# Altium PCB CH32V305G-R0-1v0.PcbDoc
Units mil, origin at the board's own origin, x right, y up, seen from the top; angles counter-clockwise.
Board outline 1456.69 x 2047.24 mil, 2 copper layers (Top Layer, Bottom Layer); 27 components, 38 nets, 145 pads, 213 vias.
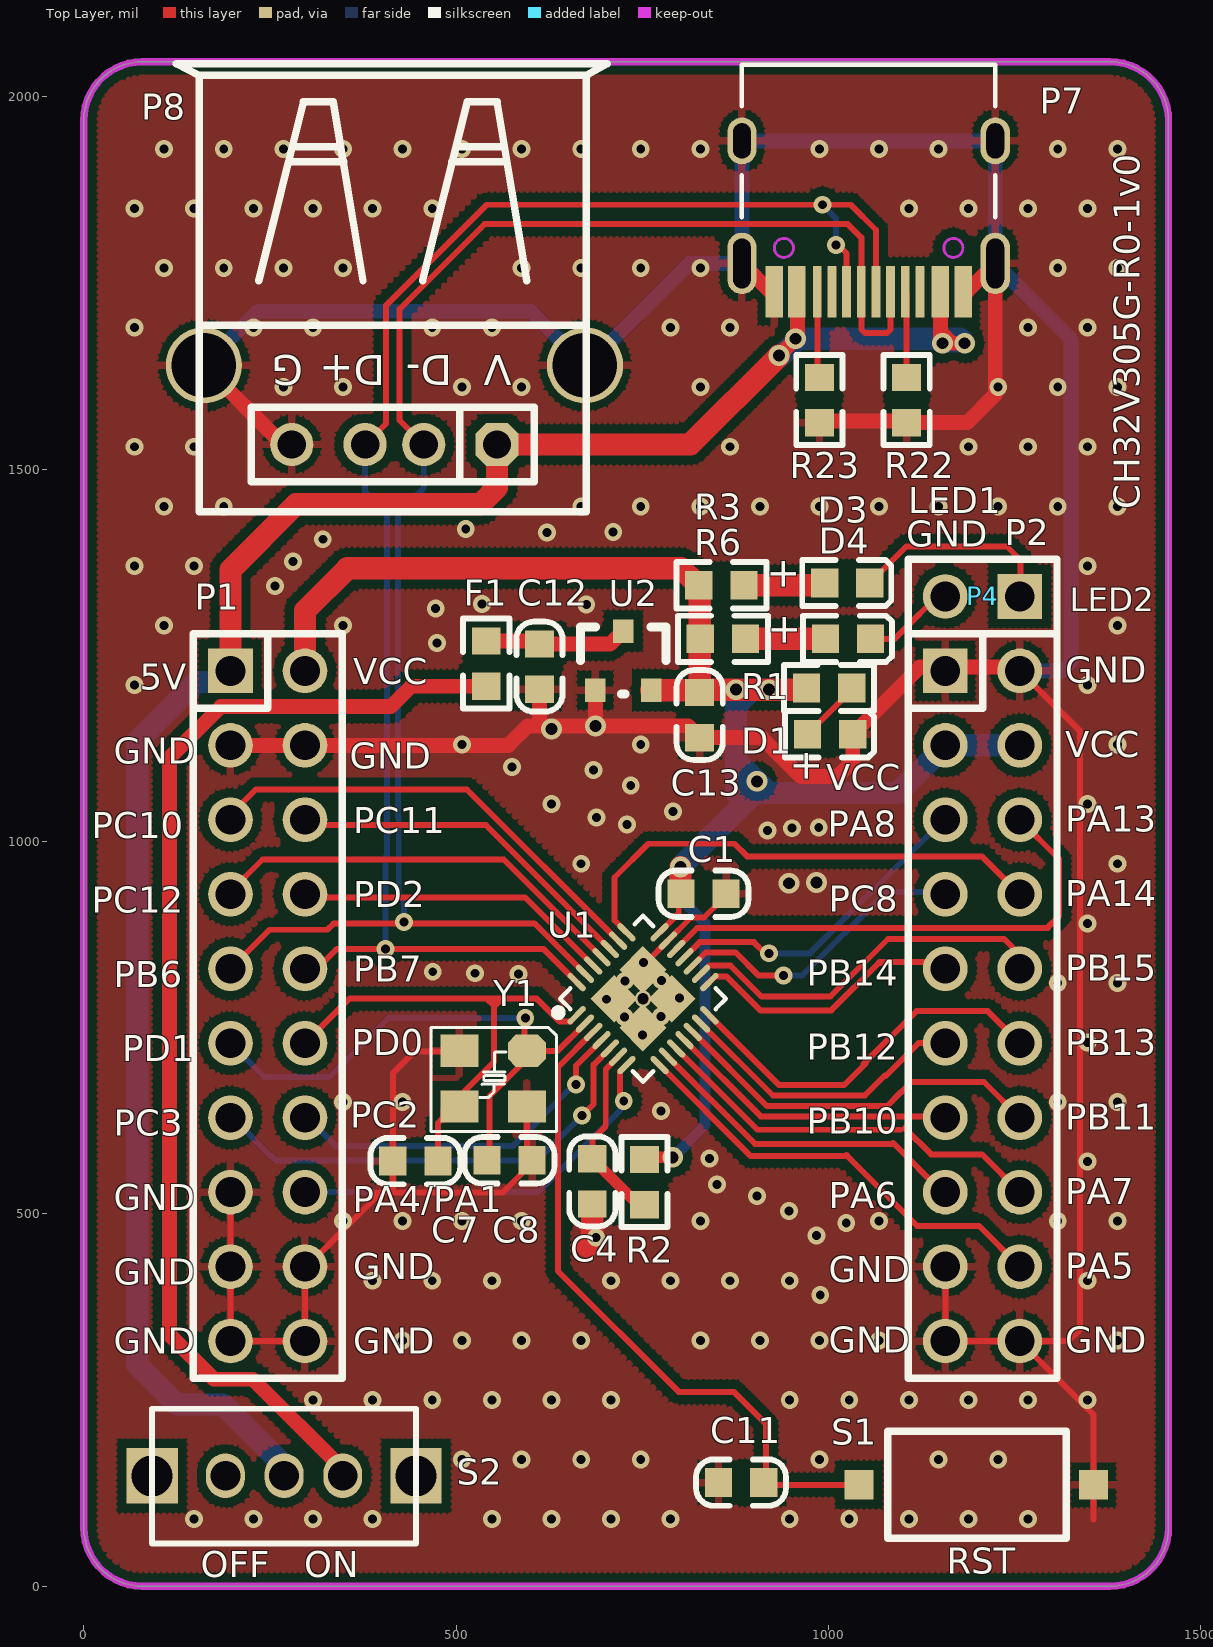
[diagram p0: Top Layer view]
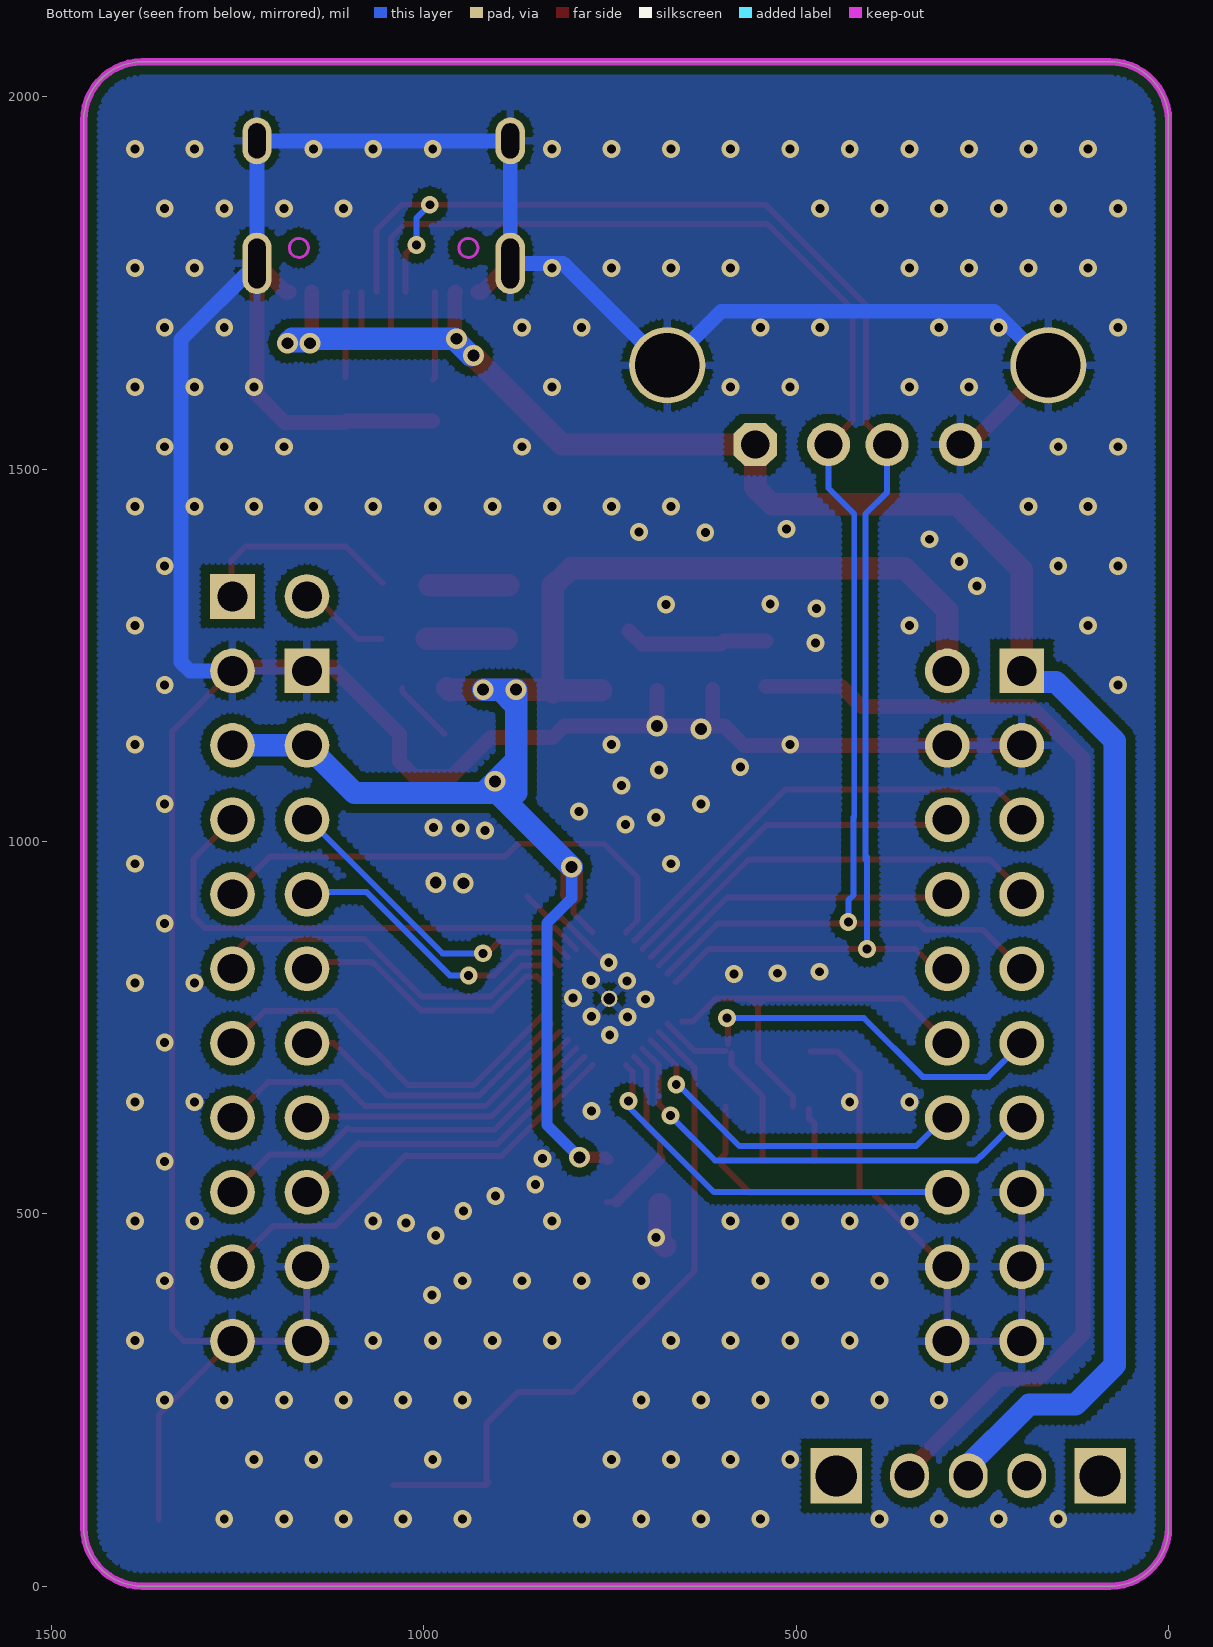
[diagram p1: Bottom Layer view, seen from below]

## Layer stack, top to bottom
Top Solder: solder mask 0.4, Solder Resist, Dk 3.5
Top Layer: signal copper 1.4
Dielectric1: dielectric 12.6, FR-4, Dk 4.8
Bottom Layer: signal copper 1.4
Bottom Solder: solder mask 0.4, Solder Resist, Dk 3.5

## Board outline
0,78.74 0,1968.5 cw(c78.74,1968.5) 78.74,2047.24 1377.95,2047.24 cw(c1377.95,1968.5) 1456.69,1968.5 1456.69,78.74 cw(c1377.95,78.74) 1377.95,0 78.74,0 cw(c78.74,78.74)

## Design rules (kind name [scope] priority, off if disabled: settings)
Clearance Clearance_1 [InPolygon] p1: gap=12 ignorepadtopadclearanceinfootprint=FALSE except(0: Arc-Hole Track-Hole SMDPad-Hole THPad-Hole Via-Hole Fill-Hole Poly-Hole Region-Hole Text-Hole)
Clearance [All] p2: gap=6 ignorepadtopadclearanceinfootprint=FALSE except(0: Arc-Hole Track-Hole SMDPad-Hole THPad-Hole Via-Hole Fill-Hole Poly-Hole Region-Hole Text-Hole)
ComponentClearance [All] p1 off: gap=10 collisioncheckmode=3 verticalgap=10 showdistances=FALSE
MinimumSolderMaskSliver [All] p1 off: minsoldermaskwidth=10
PolygonConnect PolygonConnect_1 [IsVia] p1: connectstyle=Direct reliefconductorwidth=10 reliefentries=4 polygonreliefangle="90 Angle" airgapwidth=10
PolygonConnect [All] p2: connectstyle=Relief reliefconductorwidth=10 reliefentries=4 polygonreliefangle="90 Angle" airgapwidth=10
RoutingVias [All] p1: holewidth=28 width=50 viastyle="Through Hole" minholewidth=12 minwidth=24 maxholewidth=16 maxwidth=28
SilkToSilkClearance [All] p1 off: silktosilkclearance=10
SilkToSolderMaskClearance [IsPad] p1 off: minsilkscreentomaskgap=10 clearancetoexposedcopper=TRUE
SolderMaskExpansion [All] p1: expansion=4 istentingtop=FALSE
Width [All] p1: maxlimit=50 minlimit=8 preferedwidth=10
26 further rules are at their usual default settings.

## Components (designator, comment, footprint, x,y, rotation, side; value= is the part's Value field where it differs from the comment)
C1 "0.1uF" 0603_C 802,930 r0 top
C4 "0.1uF" 0603_C 683,574 r270 top
C7 "22pF" 0603_C 415,571 r0 top
C8 "22pF" 0603_C 602,572 r180 top
C11 "0.1uF" 0603_C 852.37,139.24 r0 top
C12 "10uF" 0603_C 612,1265.24 r270 top
C13 "2.2uF" 0603_C 827,1200.24 r270 top
D1 "POWER  red" 0603+ 972,1144.24 r0 top
D3 "LED2" 0603+ 995,1347.24 r0 top
D4 "LED1" 0603+ 996,1272.24 r0 top
F1 "500mA" 0603 540.63,1208.61 r90 top
P1 "Header 10X2" IDC20-2.54mm 197,1229.24 r0 top
P2 "Header 10X2" IDC20-2.54mm 1157,1229.24 r0 top
P4 "HEADER 2" SIP2-2.54mm 1257,1329.24 r90 top
P7 "TYPE-C" TYPE-C-Receptacle-2.0 1054,1738.24 r180 top
P8 "USB_A" USBAF 555,1533.24 r180 top
R1 "1K" 0603 1031.25,1206.24 r180 top
R2 "1K" 0603 753,573 r270 top
R3 "1K" 0603 826,1344.24 r0 top
R6 "1K" 0603 828,1272.24 r0 top
R22 "5.1K" 0603 1105,1623.24 r270 top
R23 "5.1K" 0603 988,1623.24 r270 top
S1 "RST" SMD_6.1x3.65x2.5mm-KEY 1041,136.24 r0 top
S2 "SW" SW1 269,148.24 r0 top
U1 "CH32V305GBU6" QFN28_4X4 751,789 r315 top
U2 "6219P33M" SOT-23 687,1203.24 r0 top
Y1 "8M" XT3225 595,719 r180 top

## Footprints (in the part's own frame and the unit in brackets; to place one, negate y for a bottom-side part, rotate by r counter-clockwise, add the part's x,y. Pads: shape width x height; smd on the part's side, far side on the other; paste and mask are expansions set on the pad)
0603 [mm]
  rect 0.93x0.98 smd: 1(0,0) 2(1.54,0)
  silkscreen extent -0.76,-0.79 2.3,0.79
0603+ [mm]
  rect 0.93x0.98 smd: 1(0,0) 2(1.54,0)
  silkscreen extent -0.76,-0.79 2.27,0.79
0603_C [mm]
  rect 0.93x0.98 smd mask+0.051: 1(0,0) 2(1.54,0)
  silkscreen extent -0.76,-0.79 2.31,0.79
IDC20-2.54mm [mil]
  rect 60x60 hole 40: 1(0,0)
  round 60 hole 40: 2(100,0) 3(0,-100) 4(100,-100) 5(0,-200) 6(100,-200) 7(0,-300) 8(100,-300) 9(0,-400) 10(100,-400) 11(0,-500) 12(100,-500) 13(0,-600) 14(100,-600) 15(0,-700) 16(100,-700) 17(0,-800) 18(100,-800) 19(0,-900) 20(100,-900)
  silkscreen extent -50,-950 150,50
QFN28_4X4 [mm]
  rect 1.143x1.143 smd mask+0: 0(-0.699,0.698) 0(-0.699,-0.699) 0(0.698,-0.699) 0(0.699,0.698)
  round 0.559 hole 0.381 mask+0.051: 0(0,0)
  oval 0.2x0.8 smd mask+0.051: 1(-1.2,-2) 2(-0.8,-2) 3(-0.4,-2) 4(0,-2) 5(0.4,-2) 6(0.8,-2) 7(1.2,-2) 15(1.2,2) 16(0.8,2) 17(0.4,2) 18(0,2) 19(-0.4,2) 20(-0.8,2) 21(-1.2,2)
  oval 0.8x0.2 smd mask+0.051: 8(2,-1.2) 9(2,-0.8) 10(2,-0.4) 11(2,0) 12(2,0.4) 13(2,0.8) 14(2,1.2) 22(-2,1.2) 23(-2,0.8) 24(-2,0.4) 25(-2,0) 26(-2,-0.4) 27(-2,-0.8) 28(-2,-1.2)
  silkscreen extent -2,-2.51 2,2
SIP2-2.54mm [mil]
  rect 60x60 hole 40: 1(0,0)
  round 60 hole 40: 2(0,100)
  silkscreen extent -50,-50 50,150
SMD_6.1x3.65x2.5mm-KEY [mm]
  rect 1x1 smd: 1(0,0) 2(8,0)
  silkscreen extent 0.98,-1.83 7.08,1.83
SOT-23 [mm]
  rect 0.7x0.8 smd: 1(0,0) 2(1.9,0) 3(0.95,2.02)
  silkscreen extent -0.51,-0.13 2.41,2.16
SW1 [mm]
  rect 1.75x1.9 hole 1.4: 0(-4.5,0) 0(4.5,0)
  oval 1.321x1.524 hole 1.016: 1(0,0) 2(-2,0) 3(2,0)
  silkscreen extent -4.51,-2.31 4.5,2.29
TYPE-C-Receptacle-2.0 [mm]
  oval 1x2.1 hole 0.6 slot 1.7 at 90 deg: 0(-4.32,-0.97) 0(4.32,-0.97)
  oval 1x1.6 hole 0.6 slot 1.2 at 90 deg: 0(-4.32,-5.15) 0(4.32,-5.15)
  rect 0.6x1.75 smd mask+0.051: A1(-3.225,0) A4(-2.45,0) B1(3.225,0) B4(2.45,0)
  rect 0.3x1.75 smd mask+0.051: A5(-1.25,0) A6(-0.25,0) A7(0.25,0) A8(1.25,0) B5(1.75,0) B6(0.75,0) B7(-0.75,0) B8(-1.75,0)
  Keep-Out Layer circle w0.1: c2.89,-1.5 r0.325
  Keep-Out Layer circle w0.1: c-2.89,-1.5 r0.325
  silkscreen extent -4.32,-7.75 4.32,-2.55
USBAF [mm]
  round 2.6 hole 2.2: 0(-3,-2.7) 0(10,-2.7)
  oct 1.473x1.473 hole 0.965: 1(0,0)
  round 1.473 hole 0.965: 2(2.5,0) 3(4.5,0) 4(7,0)
  silkscreen extent -3.75,-12.99 10.95,2.29
XT3225 [mm]
  oct 1.3x1.1 smd: 1(0,0)
  rect 1.3x1.1 smd: 2(2.3,0) 3(2.3,1.9) 4(0,1.9)
  silkscreen extent -1.02,-0.8 3.27,2.74

## Part data
C1 C4 C12 C13: library part CAP, "Capacitor"
C7 C8 C11: library part Cap, "Capacitor"
  C7 C8: LatestRevisionDate=17-Jul-2002, LatestRevisionNote="Re-released for DXP Platform.", PackageReference=RAD-0.3, Published=8-Jun-2000, Publisher="Altium Limited"
D1 D3 D4: library part LED0, "Typical INFRARED GaAs LED", LatestRevisionDate=08-Jul-2005, LatestRevisionNote="Mech Layer 1 removed.", PackageReference=LED-0, Published=8-Jun-2000, Publisher="Altium Limited"
F1: library part FUSE1, "Fuse"
P1 P2: "Header, 10-Pin, Dual row", LatestRevisionDate=17-Jul-2002, LatestRevisionNote="Re-released for DXP Platform.", Publisher="Altium Limited"
P4: "Header, 2-Pin"
P7: library part TYPE-C1
P8: library part USB, "USB Port"
R1 R2 R3 R6: library part "Res Semi", "Semiconductor Resistor"
  R1: LatestRevisionDate=17-Jul-2002, LatestRevisionNote="Re-released for DXP Platform.", PackageReference=AXIAL-0.5, Published=8-Jun-2000, Publisher="Altium Limited"
R22 R23: library part Res2, "Resistor"
S1: library part KEY
U1: "RISC-V MCU, 144MHz, USB_480M, CAN, UART*4, SPI*3, SDIO"
Y1: library part XTAL, "Crystal Oscillator", LatestRevisionDate=17-Jul-2002, LatestRevisionNote="Re-released for DXP Platform.", PackageReference=R38, Published=8-Jun-2000, Publisher="Altium Limited"

## Via types
v1: diameter 24, hole 12, Top Layer to Bottom Layer, tented both sides, 200 vias
v2: diameter 28, hole 16, Top Layer to Bottom Layer, tented both sides, 13 vias

## Nets (pads, with @x,y where several pads share a name; then routed paths per layer and width w, separated by ;. In a path a pad name is that pad's centre, name@x,y a point inside that pad or via, vN(x,y) a via of type N, cw(c..) or ccw(c..) an arc to the next point about the centre after c; other vN are vias at no path point)
GND: C1.2 C4.2 C7.1 C8.1 C11.1 C12.2 C13.2 D1.2 P1.3 P1.4 P1.15 P1.17 P1.18 P1.19 P1.20 P2.1 P2.2 P2.17 P2.19 P2.20 P7.0 P7.A1 P7.B1 P8.0 P8.4 R22.2 R23.2 S1.2 U1.0 U1.20 U2.1 Y1.2 Y1.4 | length 6921.2
  Top Layer w8: P1.15 P1.17 P1.19 P1.20 P1.18 299.24,429.24 394,524 394,529 415,529 ; Y1.2@481,718 444,718 415,689 415,529 ; Y1.4 595,581 C8.1@602,574 ; C8.1@600,566 563,529 415,529 ; U1.0@751,827.89 756.3,833.19 756.3,838.76 784.41,866.86 U1.20 815.46,898 833,898 C1.2@861,926 ; P2.17 P2.19 P2.20 ; P2.2 1338,1148.24 1338,345.24 1322,329.24 P2.20 ; 1355.96,89.92 S1.2 1355.96,230.28 P2.20
  Top Layer w20: P8.0@161.3,1639.54 267.6,1533.24 P8.4 ; P1.3 P1.4 570.24,1129.24 596.24,1155.24 610,1155.24 ; C12.2 612,1157.24 610,1155.24 ; v2(687,1155.24) U2.1 ; P7.0@883.92,1776.43 922.11,1738.24 P7.B1 ; R23.2@988,1564.61 1103,1564.61 R22.2 1186.37,1562.61 1224.08,1600.32 1224.08,1776.43 1185.89,1738.24 P7.A1 ; P2.2@1257,1234.24 1122.63,1234.24 D1.2 1032.63,1107.87 1012,1087.24 963,1087.24 910.63,1139.61 C13.2 811.37,1155.24 610,1155.24
  Top Layer w30: 676.01,456.59 683,463.59 C4.2
  Bottom Layer w20: P8.0@161.3,1639.54 234,1712.24 600.41,1712.24 673.11,1639.54 676.03,1639.54 812.92,1776.43 883.92,1776.43 883.92,1941 1224.08,1941 1224.08,1776.43 1326,1674.51 1326,1240.96 1314.28,1229.24 P2.2
  other v1: 148,90.24 228,90.24 308,90.24 388,90.24 548,90.24 628,90.24 708,90.24 788,90.24 948,90.24 1028,90.24 1108,90.24 1188,90.24 1268,90.24 508,170.24 588,170.24 668,170.24 748,170.24 988,170.24 1148,170.24 1228,170.24 308,250.24 388,250.24 468,250.24 548,250.24 628,250.24 708,250.24 948,250.24 1028,250.24 1108,250.24 1188,250.24 1268,250.24 1348,250.24 428,330.24 508,330.24 588,330.24 668,330.24 828,330.24 908,330.24 988,330.24 1068,330.24 1388,330.24 989,391 388,410.24 468,410.24 548,410.24 708,410.24 788,410.24 868,410.24 948,410.24 1348,410.24 687.95,468.54 984,471 1024,488 348,490.24 428,490.24 508,490.24 588,490.24 828,490.24 1068,490.24 1308,490.24 1388,490.24 947,504 904,524 850.32,539.57 1348,570.24 840.52,574.64 775.01,638.43 348,650.24 428,650.24 1308,650.24 1388,650.24 1348,730.24 750.29,740.21 726.25,764.25 775.04,764.96 702.21,788.29 799.79,789.71 1308,810.24 1388,810.24 726.96,813.04 775.75,813.75 583.67,822.02 525.18,823.21 468.66,825.19 751.71,837.79 1348,890.24 668,970.24 1388,970.24 918,1015 951,1018 987,1019 729.33,1022.82 688.37,1032.21 791.49,1040.58 628,1050.24 1348,1050.24 734.52,1075.12 684.32,1096.17 575.02,1100.22 508,1130.24 748,1130.24 1388,1130.24 68,1210.24 1348,1210.24 474.18,1266.75 108,1290.24 348,1290.24 1388,1290.24 472.64,1313.23 674.86,1318.6 534.78,1319.07 257,1343 68,1370.24 148,1370.24 1348,1370.24 281,1376 321,1406 622,1415 711,1416 513,1420 108,1450.24 188,1450.24 668,1450.24 748,1450.24 828,1450.24 908,1450.24 988,1450.24 1068,1450.24 1148,1450.24 1228,1450.24 1308,1450.24 1388,1450.24 68,1530.24 148,1530.24 868,1530.24 1188,1530.24 1268,1530.24 1348,1530.24 268,1610.24 348,1610.24 508,1610.24 588,1610.24 828,1610.24 1228,1610.24 1308,1610.24 1388,1610.24 68,1690.24 228,1690.24 308,1690.24 468,1690.24 548,1690.24 788,1690.24 868,1690.24 1268,1690.24 1348,1690.24 108,1770.24 188,1770.24 268,1770.24 348,1770.24 588,1770.24 668,1770.24 748,1770.24 828,1770.24 1308,1770.24 1388,1770.24 68,1850.24 148,1850.24 228,1850.24 308,1850.24 388,1850.24 468,1850.24 1108,1850.24 1188,1850.24 1268,1850.24 1348,1850.24 108,1930.24 188,1930.24 268,1930.24 348,1930.24 428,1930.24 508,1930.24 588,1930.24 668,1930.24 748,1930.24 828,1930.24 988,1930.24 1068,1930.24 1148,1930.24 1308,1930.24 1388,1930.24
  other v2: 947,944 984,945 628,1151
LED1: D4.2 P4.2 | length 130
  Top Layer w8: D4.2 1089,1272.24 P4.2@1158,1341.24
LED2: D3.2 P4.1 | length 267
  Top Layer w8: D3.2 1104.63,1396.24 1239.76,1396.24 1258,1378 P4.1@1258,1341.24
NetD1_1: D1.1 R1.1 | length 85.6
  Top Layer w8: D1.1 1029,1201.24 R1.1@1029,1206.24
NetD3_1: D3.1 R3.2 | length 105.4
  Top Layer w30: R3.2 D3.1@992,1344.24
NetD4_1: D4.1 R6.2 | length 107.4
  Top Layer w30: R6.2 D4.1
NetF1_1: F1.1 S2.3 | length 1549.2
  Top Layer w20: S2.3@349,156 227,278 175,278 115,338 115,1112.3 183.95,1181.24 412.24,1181.24 439.61,1208.61 F1.1
NetP7_A5: P7.A5 R22.1 | length 115.7
  Top Layer w8: P7.A5 1105,1736.46 R22.1
NetP7_B5: P7.B5 R23.1 | length 119.2
  Top Layer w8: P7.B5 985.1,1623.14 R23.1@988,1620.24
PA4/PA1: P1.16 U1.7 | length 537.2
  Top Layer w8: v1@722,659 720,661 720,691.19 U1.7
  Bottom Layer w8: P1.16 610.41,529.24 725.18,644.01 v1(725.18,651.43) ; v1@719,651.43 722.11,648.31 v1@722.11,644.04
PA5: P2.18 U1.8 | length 598.3
  Top Layer w8: U1.8 895.19,578 1025,578 ; 1024,579 1025,578 ; 1026,578 1025,578 ; P2.18 1202.24,484 1119,484 1025,578
PA6: P2.15 U1.9 | length 449.3
  Top Layer w8: U1.9 901.46,594 1088,594 ; 1087,595 1088,594 ; P2.15 1152.76,529.24 1088,594
PA7: P2.16 U1.10 | length 536.6
  Top Layer w8: U1.10 904.73,613 1097,613 ; 1102.76,615.24 1138,580 1206.24,580 P2.16
PA8: P2.5 U1.18 | length 424.8
  Top Layer w8: U1.18 827,865 864,865 867,865 899.86,865 914.86,850 v1(920.43,850)
  Bottom Layer w8: v1(920.43,850) 975,850 P2.5@1146,1021
PA13: P2.6 U1.19 | length 702.9
  Top Layer w8: U1.19 823.73,884 896,884 ; P2.6 1309.59,976.66 1309.59,899.83 1294.76,885 ; 1294.64,884 914,884 ; 896,884 915,884 914,884 ; 896,884 914,884
PA14: P2.8 U1.22 | length 671.4
  Top Layer w8: U1.22 728.73,878.17 720.38,886.53 720.38,886.62 712.79,894.21 712.79,951.86 758,997.07 873.9,997.07 890.87,980.1 1206.15,980.1 P2.8
PB6: P1.9 P7.A7 P7.B7 P8.2 U1.27 | length 2274.9
  Top Layer w8: P1.9 249.38,881.62 327.13,881.62 335.51,890 430,890 605.46,890 U1.27 ; P8.2 424,1565.82 424,1715 538.24,1829.24 1026,1829.24 1044.16,1811.09 P7.A7 1044.16,1687.69 1048.84,1683 1078.84,1683 1083.53,1687.69 P7.B7
  Bottom Layer w8: 422,1033.24 422,1440 456.57,1474.57 P8.2 ; 423,1033 423,928 430,921 v1(430,892)
PB7: P1.10 P7.A6 P7.B6 P8.3 U1.28 | length 2227
  Top Layer w8: P1.10 302.8,829.24 313.24,829.24 339,855 ; 340.04,856 v1(405,856) 617.19,856 U1.28 ; P8.3 406,1561.41 406,1720.24 541,1855.24 v1(992,1855.24) 1030,1855.24 1063.84,1821.4 P7.A6 ; v1(1010,1801.24) 1013,1801.24 1024.47,1789.77 P7.B6
  Bottom Layer w8: P8.3 377.83,1469.17 407,1440 407,976.24 ; v1(405,856) 405,979 ; v1(992,1855.24) 1010,1837.24 v1(1010,1801.24)
PB10: P2.13 U1.11 | length 403.3
  Top Layer w8: U1.11 909,631 P2.13@1155.24,631 ; P2.13@1150.24,636 P2.13@1155.24,631 ; P2.13 P2.13@1155.24,631 ; P2.13@1158,631 P2.13@1155.24,631
PB11: P2.14 U1.12 | length 515.3
  Top Layer w8: U1.12 917.27,645 1079,645 1098,664 ; 1096.76,663 1111,677.24 1209,677.24 P2.14
PB12: P2.11 U1.13 | length 396.8
  Top Layer w8: U1.13 925.54,659 1049,659 1076,686 ; 1076.76,685 1121,729.24 P2.11
PB13: P2.12 U1.14 | length 518.1
  Top Layer w8: U1.14 933.81,673 1021,673 1050,702 ; 1047,701 1118.24,772.24 1214,772.24 P2.12
PB14: P2.9 U1.15 | length 358
  Top Layer w8: U1.15 848.35,819.53 848.44,819.53 849.37,818.6 863.41,818.6 908.57,773.44 1003.99,773.44 1067.55,837 1070,837 ; 1068.8,838.24 P2.9@1148,838.24
PB15: P2.10 U1.16 | length 509.7
  Top Layer w8: U1.16 840.1,833.56 868.25,833.56 909.9,791.9 1002.66,791.9 1080,869.24 1236,869.24 1257,848.24 P2.10
PC2: P1.14 U1.4 | length 485.1
  Top Layer w8: v1(661,674) 661,699 U1.4
  Bottom Layer w8: P1.14@300,630 339,591 576,591 659,674 v1(661,674)
PC3: P1.13 U1.5 | length 623.2
  Top Layer w8: v1(669,632) 684.69,647.69 684.69,700.42 U1.5
  Bottom Layer w8: P1.13@200,629 252,577 253,577 258,572 609,572 v1(669,632)
PC8: P2.7 U1.17 | length 400.3
  Top Layer w8: U1.17 835.27,851 875.34,851 905.95,820.38 v1(939.76,820.38)
  Bottom Layer w8: v1(939.76,820.38) 965.18,820.38 1076.8,932 P2.7@1152,932
PC10: P1.5 U1.23 | length 616
  Top Layer w8: P1.5@199,1038 231,1070 514.54,1070 U1.23
PC11: P1.6 U1.24 | length 481
  Top Layer w8: P1.6@298,1031 298.38,1030.62 306.73,1022.27 540,1022.27 U1.24
PC12: P1.7 U1.25 | length 571.9
  Top Layer w8: P1.7@196,932 240,976 564,976 U1.25
PD0: C7.2 P1.12 U1.1 Y1.3 | length 662.1
  Top Layer w8: P1.12 356.76,789 541.22,789 ; C7.2 475.63,621.86 480.32,626.54 482.86,626.54 483,626.69 Y1.3@483,641 ; Y1.3 504.45,657.61 551,704.16 551,777.9 ; U1.1@653.56,758.47 638.7,758.47 608.17,789 562.1,789 ; 541.22,789 551,789 ; 541.22,789 551,779.22 ; 551,777.9 551,779.22 ; 551,777.9 562.1,789 ; 551,779.22 551,789 ; 551,789 562.1,789
PD1: C8.2 P1.11 U1.2 Y1.1 | length 737.4
  Top Layer w8: C8.2 544.97,575.6 544.97,657.97 587,700 Y1.1@587,716 ; Y1.1@591.83,728.17 591.83,761.93 v1(592.96,763.06) ; Y1.1 636.46,719 U1.2
  Bottom Layer w8: P1.11@198,728 242,684 330,684 409.06,763.06 v1(592.96,763.06)
PD2: P1.8 U1.26 | length 429.9
  Top Layer w8: P1.8 P1.8@297,939.24 ; P1.8@303,927 305,925 592.73,925 U1.26
RST: C11.2 S1.1 U1.3 | length 914.3
  Top Layer w8: U1.3 636.82,697.09 636.82,423.18 799,261 873,261 916,218 916,142.24 C11.2 916,136.24 S1.1
V5V: C12.1 F1.2 U2.3 | length 187
  Top Layer w20: F1.2 C12.1@597,1269.24 ; C12.1@601,1265.24 C12.1 706.87,1265.24 U2.3
VBUS: P1.1 P7.A4 P7.B4 P8.1 S2.1 | length 2819.7
  Top Layer w15: v2@1150.46,1671.79 v2(1153,1669.24) v2@1165.51,1669.24 ; 1150.46,1684.3 1150.46,1691
  Top Layer w20: v2(933.5,1652.74) v2(956,1675.24) 956,1677.41 958.45,1679.86 958.45,1737.34 P7.B4 ; v2@1150.46,1671.79 1150.46,1684.3 1165.51,1669.24 v2(1183,1669.24) ; 1150.46,1691 P7.A4
  Top Layer w30: P1.1 197,1365 285,1453 532.55,1453 555,1475.45 P8.1 814.38,1533.24 933.5,1652.37 v2(933.5,1652.74)
  Bottom Layer w15: v2(933.5,1652.74) v2@937.02,1652.74 ; v2(956,1675.24) 959.52,1675.24 v2@965,1675.24 ; v2@1147,1675.24 1150.51,1671.73 v2(1153,1669.24) ; v2@1180.51,1671.73 v2(1183,1669.24)
  Bottom Layer w30: P1.1 182,1214.24 151.24,1214.24 72,1135 72,297 125,244 187,244 277,154 S2.1@277,147 ; v2@937.02,1652.74 v2@959.52,1675.24 ; v2@965,1675.24 1147,1675.24 1177,1675.24 1180.51,1671.73 v2@1150.51,1671.73
VCC: C1.1 C13.1 P1.2 P2.3 P2.4 R1.2 R2.1 R3.1 R6.1 U1.21 U2.2 | length 2371.7
  Top Layer w8: U1.21 799,903.81 C1.1@799,923 ; U1.21@778,882 U1.21@780,884
  Top Layer w15: R2.1 756,576 v2(791,576)
  Top Layer w30: P1.2 297,1310 354,1367 802.36,1367 820.83,1348.54 822.69,1348.54 826,1345.23 R3.1 ; U2.2 C13.1@827,1203.24 ; C1.1@801,930 C1.1 801.47,930.53 v2(801.47,965.89) ; C13.1 C13.1@827,1203.24 ; R3.1@827,1343.24 C13.1@827,1203.24 ; R1.2@968.37,1206.24 965.37,1203.24 964.61,1204 v2(920.31,1204) v2(876,1204) 827.76,1204 C13.1@827,1203.24
  Bottom Layer w15: v2(791,576) 834.42,619.42 834.42,890.58 801.47,923.53 v2(801.47,965.89)
  Bottom Layer w30: v2(801.47,965.89) 900.82,1065.24 ; 876,1065.24 876,1109.24 ; 890.24,1065.24 900.82,1065.24 ; 892,1067 904.29,1079.29 v2(904.29,1080.95) 876,1109.24 ; v2@910.41,1074.83 920,1065.24 ; v2(920.31,1204) 898,1204 ; P2.4 P2.3 1093,1065.24 920,1065.24 ; 876,1109.24 876,1182 ; 876,1182 898,1204 ; 876,1182 v2(876,1204) 898,1204 ; 900.82,1065.24 909.24,1065.24 920,1065.24
VIO: C4.1 R2.2 U1.6 | length 246.4
  Top Layer w8: C4.1 683,599.89 701,617.89 701,694.46 U1.6 ; R2.2@741,516 R2.2@754,516
  Top Layer w15: C4.1 R2.2@741,516
pads on no net: P7.A8 P7.B8 S2.0 S2.2

## Polygon pours and split planes (outlines as drawn)
GND on Bottom Layer "Top Layer-No Net" (hatched 90Degree grid 8 track 8, remove dead copper, pour order 1): 5,1980 5,2001 66,2062 91,2037 1407,2037 1414,2037 1453,1998 1450,1995 1450,54 1450,51 1395,-4 1389,2 45,2 45,11 -1,57 2,60 2,1998
GND on Top Layer "Top Layer-No Net" (hatched 90Degree grid 8 track 8, remove dead copper, pour order 0): 0,1994 14,1994 73,2053 82,2044 1403,2044 1412,2044 1470,1986 1454,1970 1454,61 1454,37 1392,-25 1364,3 42,3 33,3 3,33 6,36 6,1994

## Keep-outs
Keep-Out Layer:
  the board outline again, w10

## Silkscreen, mask and mechanical layers (free items; w line width, h text height)
Top Overlay:
  text "CH32V305G-R0-1v0" at 1418,1446 h35 r90
  text "LED1" at 1107,1441 h35
  text "GND" at 1104.63,1396.24 h35
  text "LED2" at 1324,1309 h32
  text "GND" at 1318,1213.24 h35
  text "VCC" at 362,1211.24 h35
  text "5V" at 74.99,1204.24 h35
  text "VCC" at 1318,1113.24 h35
  text "GND" at 40,1104.35 h35
  text "GND" at 357,1098 h35
  text "VCC" at 997,1069 h35
  text "PA13" at 1318,1013.24 h35
  text "PC11" at 362,1011.47 h35
  text "PA8" at 999,1006.24 h35
  text "PC10" at 10.84,1004.47 h35
  text "PA14" at 1318,913.24 h35
  text "PD2" at 362,911.58 h35
  text "PC8" at 1000.16,905.86 h35
  text "PC12" at 10.84,904.58 h35
  text "PB15" at 1318,813.24 h35
  text "PB7" at 362,811.69 h35
  text "PB14" at 971,806.36 h35
  text "PB6" at 40,804.69 h35
  text "PD0" at 360.18,712.83 h35
  text "PB13" at 1318,713.24 h35
  text "PB12" at 971,706.85 h35
  text "PD1" at 51.66,704.8 h35
  text "PC2" at 358.01,615.38 h35
  text "PB11" at 1318,613.24 h35
  text "PB10" at 971,607.35 h35
  text "PC3" at 40,604.91 h35
  text "PA7" at 1318,513.24 h35
  text "PA6" at 1000.16,507.84 h35
  text "GND" at 40,505.02 h35
  text "PA4/PA1" at 360.99,502.36 h35
  text "PA5" at 1318,413.24 h35
  text "GND" at 362,412.13 h35
  text "GND" at 1000.16,408.34 h35
  text "GND" at 40,405.13 h35
  text "GND" at 1000.16,313.24 h35
  text "GND" at 1318,313.24 h35
  text "GND" at 40,312.24 h35
  text "GND" at 362,312.24 h35
  text "OFF" at 157,12 h35
  text "ON" at 296,12 h35
Mechanical 1:
  the board outline again, w10

## Text inside footprints (layer, text, board x,y; h text height)
D1: Top Overlay "+" at 988,1078.24 h40 r90
D3: Top Overlay "+" at 956.92,1336.26 h40 r90
D4: Top Overlay "+" at 957.92,1261.26 h40 r90
P8: Top Overlay "D-" at 495,1653.24 h40 r180; Top Overlay "D+" at 405,1653.24 h40 r180; Top Overlay "V" at 575,1653.24 h40 r180; Top Overlay "G" at 295,1653.24 h40 r180